# Altium PCB MBOARD.PCBDOC
Units mil, origin at the board's own origin, x right, y up, seen from the top; angles counter-clockwise.
Board outline 6265 x 3760 mil, 2 copper layers (Top Layer, Bottom Layer); 45 components, 37 nets, 161 pads, 107 vias.
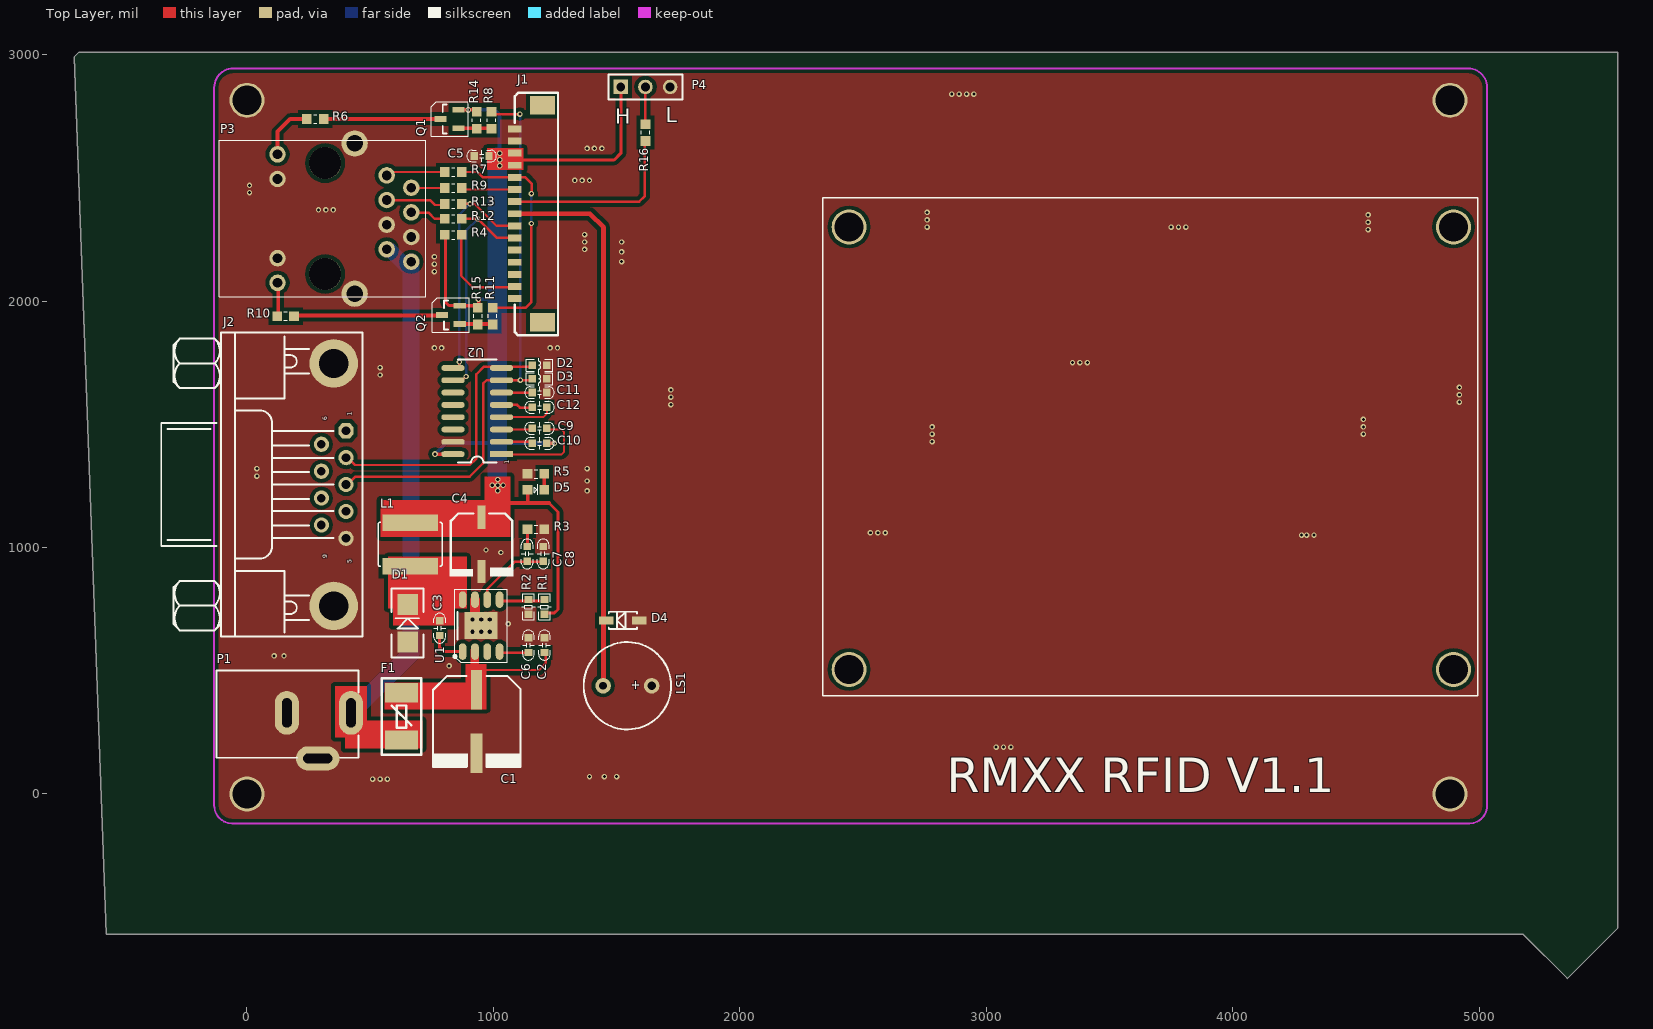
[diagram p0: Top Layer view]
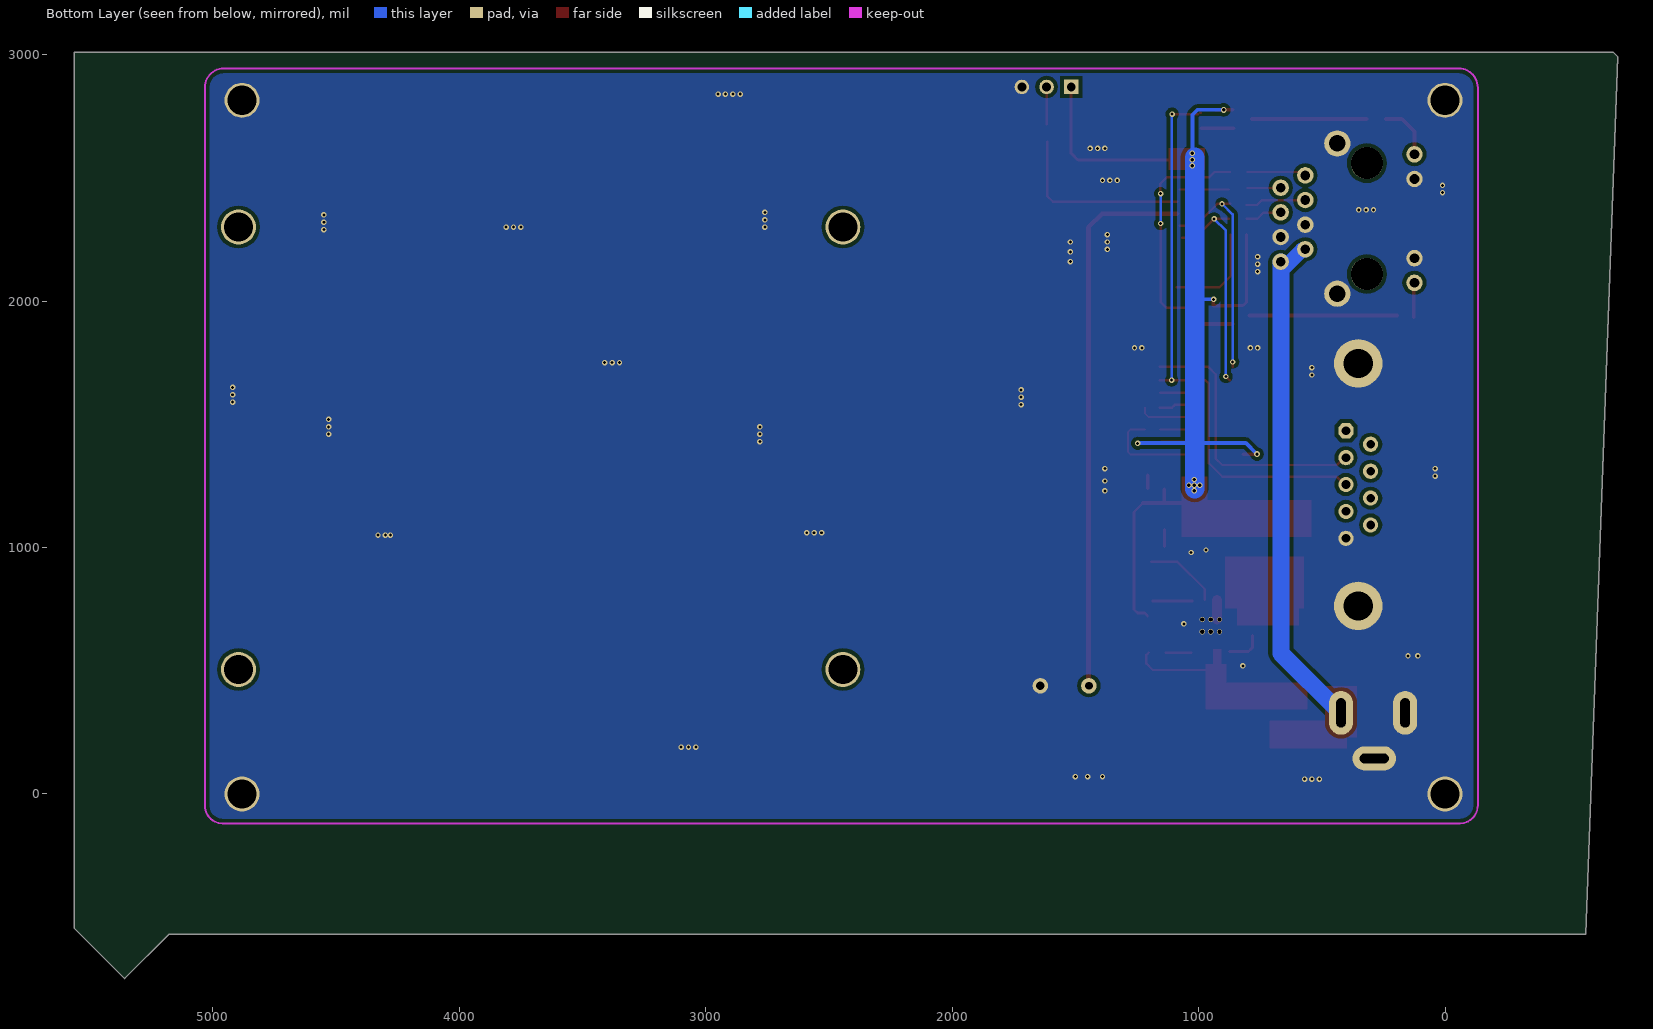
[diagram p1: Bottom Layer view, seen from below]

## Layer stack, top to bottom
Top Layer: signal copper 1.4
Dielectric: core 12.6, FR-4, Dk 4.8
Bottom Layer: signal copper 1.4

## Board outline
-701.7,2990.57 -681.7,3010.57 5563.3,3010.57 5563.3,-544.43 5358.3,-749.43 5178.3,-569.43 -571.7,-569.43

## Design rules (kind name [scope] priority, off if disabled: settings)
Clearance [All] p1 off: gap=15
ComponentClearance [All] p1 off: gap=10 collisioncheckmode=3 verticalgap=10
HoleSize [All] p1: absolutevalues=TRUE maxlimit=300 minlimit=0 maxpercent=80.000 minpercent=20.000
PlaneConnect [All] p1: planeconnectstyle=Relief reliefexpansion=20 reliefentries=4 reliefconductorwidth=14 reliefairgap=10
PolygonConnect [All] p1: connectstyle=Direct reliefconductorwidth=15 reliefentries=4 polygonreliefangle="90 Angle"
RoutingVias [All] p1: holewidth=15 width=25 viastyle="Through Hole" minholewidth=8 minwidth=15 maxholewidth=200 maxwidth=300
SolderMaskExpansion [All] p1: expansion=4
TestPointUsage [All] p1: valid=0 allowmultiple=FALSE
Testpoint [(IsPad And (OnTopLayer Or OnBottomLayer))] p1: side=3 testpointundercomponent=TRUE minsize=40 maxsize=100 preferedsize=60 minholesize=0 maxholesize=40 preferedholesize=32 testpointgrid=1 style=297 order=0-112345678
Width [All] p1: maxlimit=100 minlimit=8 preferedwidth=10 minimp=50.000000 maximp=50.000000 favimp=50.000000
16 further rules are at their usual default settings.

## Components (designator, comment, footprint, x,y, rotation, side; value= is the part's Value field where it differs from the comment)
C1 "Cap Pol1" C8x10-SMD 932,294 r270 top
C2 "Cap" 0603C 1207,604 r180 top
C3 "Cap" 0603C 782.08,673.06 r0 top
C4 "Cap Pol1" C6.3x5.4-SMD 952.08,1013.06 r270 top
C5 "Cap" 0603C 952,2589 r270 top
C6 "Cap" 0603C 1142,604 r180 top
C7 "Cap" 0603C 1137,974 r0 top
C8 "Cap" 0603C 1202,974 r0 top
C9 "0.1uF" 0603C 1187,1484 r270 top
C10 "0.1uF" 0603C 1187.08,1423.06 r90 top
C11 "0.1uF" 0603C 1187,1629 r90 top
C12 "0.1uF" 0603C 1187,1569 r270 top
D1 "SS54" SMA 652.08,693.06 r90 top
D2 "ESD" 0603L 1187,1739 r270 top
D3 "ESD" 0603L 1187,1684 r270 top
D4 "1N4007W" SOD-123 1592,704 r270 top
D5 "LED" 0603-LED 1172,1234 r0 top
F1 "Fuse Thermal" 1812F 627,219 r90 top
J1 "Interface" 1.25-15P 1087,2699 r270 top
J2 "DB9" DB-9/M 402,1474 r0 top
L1 "Inductor" L-6045 662.08,923.06 r90 top
LS1 "Bell" BEEP-9x5.5 1642,439 r180 top
P1 "POW" DC-005 167,329 r0 top
P3 "HR911105A" RJ-45 237,2329 r270 top
P4 "CS" HDR1X3 1517,2869 r0 top
Q1 "SI2305" SOT-23-PMOS 822,2739 r180 top
Q2 "SI2305" SOT-23-PMOS 827,1944 r180 top
R1 "Res Semi" 0603R 1207,759 r0 top
R2 "Res Semi" 0603R 1142,759 r0 top
R3 "Res Semi" 0603 1172,1074 r180 top
R4 "Res Semi" 0603 837,2269 r0 top
R5 "Res1" 0603 1172,1299 r0 top
R6 "Res Semi" 0603 277,2739 r180 top
R7 "Res Semi" 0603 837,2524 r0 top
R8 "Res Semi" 0603 992,2734 r270 top
R9 "Res Semi" 0603 837,2459 r0 top
R10 "Res Semi" 0603 157,1939 r180 top
R11 "Res Semi" 0603 997,1939 r270 top
R12 "Res Semi" 0603 837,2334 r0 top
R13 "Res Semi" 0603 837,2394 r0 top
R14 "Res Semi" 0603 932,2734 r270 top
R15 "Res Semi" 0603 937,1939 r270 top
R16 "Res Semi" 0603 1617,2684 r90 top
U1 "TPS54331" SOP8-POW 950.08,683.06 r90 top
U2 "SP3232EEN" SOIC16-1.27 937.08,1528.06 r180 top

## Footprints (in the part's own frame and the unit in brackets; to place one, negate y for a bottom-side part, rotate by r counter-clockwise, add the part's x,y. Pads: shape width x height; smd on the part's side, far side on the other; paste and mask are expansions set on the pad)
1.25-15P [mm]
  rect 1.9x2.6 smd: 0(-2.45,2.835) 0(19.95,2.835)
  rect 0.7x1.4 smd: 1(17.5,0) 2(16.25,0) 3(15,0) 4(13.75,0) 5(12.5,0) 6(11.25,0) 7(10,0) 8(8.75,0) 9(7.5,0) 10(6.25,0) 11(5,0) 12(3.75,0) 13(2.5,0) 14(1.25,0) 15(0,0)
  silkscreen extent -3.7,0 21.28,4.45
0603 [mm]
  rect 1x1 smd: 1(-0.864,0) 2(0.864,0)
  silkscreen extent -0.18,-0.43 0.18,0.43
0603-LED [mm]
  rect 1x1 smd: 1(-0.864,0) 2(0.864,0)
  silkscreen extent -0.18,-0.51 0.18,0.56
0603C [mil]
  rect 31.5x30 smd: 1(0,30) 2(0,-30)
  silkscreen extent -24,-60 24,60
0603L [mil]
  rect 31.5x30 smd: 1(-0.91,-29.91) 2(-0.91,30.09)
  silkscreen extent -28,-54 27,54
0603R [mil]
  rect 31.5x30 smd: 1(0,30) 2(0,-30)
  silkscreen extent -28,-53 28,53
1812F [mm]
  rect 2x3.4 smd: 1(0,0) 2(4.85,0)
  silkscreen extent -1.5,-2.03 6.35,2.03
BEEP-9x5.5 [mm]
  round 1.6 hole 0.8: 1(5,0)
  round 1.6 hole 0.9: 2(0,0)
  silkscreen extent -2,-4.5 7,4.5
C6.3x5.4-SMD [mm]
  rect 2.4x0.85 smd: 1(-2.794,0) 2(2.794,0)
  silkscreen extent -3.18,-3.3 3.3,3.3, body extent -3.24,-3.18 3.24,3.18, height 3.5
C8x10-SMD [mm]
  rect 4.1x1.148 smd: 1(-3.277,0)
  rect 4.1x1.25 smd: 2(3.277,0)
  silkscreen extent -4.7,-4.5 4.7,4.5, body extent -4.65,-4.25 4.65,4.25, height 10.5
DB-9/M [mil]
  oct 62x62 hole 35: 1(0,0)
  round 62 hole 35: 2(0,-109.17) 3(0,-218.33) 4(0,-327.5) 5(0,-436.67) 6(-100,-55) 7(-100,-164.17) 8(-100,-273.33) 9(-100,-382.5)
  round 196.67 hole 118.33: BO1(-50,-710.83) BO2(-50,273.33)
  silkscreen extent -750,-835 67,398
DC-005 [mm]
  oval 2.5x4.5 hole 1 slot 3 at 90 deg: 1(6.477,0) 2(-0.127,0)
  oval 4.5x2.5 hole 1 slot 3 at 0 deg: 3(3.048,-4.699)
  silkscreen extent -7.37,-4.63 7.23,4.37
HDR1X3 [mm] "Connector; Header; 3 Position"
  rect 1.5x1.5 hole 0.9: 1(0,0)
  round 1.5 hole 0.9: 2(2.54,0) 3(5.08,0)
  silkscreen extent -1.27,-1.27 6.35,1.27
L-6045 [mm]
  rect 1.7x5.7 smd: 1(0,0) 2(4.5,0)
  silkscreen extent 0,-3.3 4.57,3.3
RJ-45 [mm]
  round 1.699 hole 1.001: 1(-4.6,8.38) 2(-3.33,10.92) 3(-2.06,8.38) 4(-0.79,10.92) 5(0.48,8.38) 6(1.75,10.92) 7(3.02,8.38) 8(4.29,10.92) 9(-6.775,-2.87) 10(-4.235,-2.87) 11(3.935,-2.87) 12(6.475,-2.87)
  round 2.7 hole 1.7: 13(-7.895,5.08) 14(7.595,5.08)
  round 3.3 hole 3.3: ""(-5.865,2.03) ""(5.565,2.03)
  silkscreen extent -8.2,-8.89 7.9,12.41
SMA [mm] "Molded Diode, 2-Leads, Body 4.3x2.7mm, IPC Medium Density"
  rect 2.15x2.15 smd: 1(-1.93,0) 2(1.93,0)
  silkscreen extent -3.56,-1.65 3.56,1.65, body extent -2.28,-1.42 2.29,1.42, height 2.95
SOD-123 [mm]
  rect 0.85x1.524 smd: 1(0,0) 2(0,-3.4)
  silkscreen extent -0.9,-3.15 0.9,-0.25
SOIC16-1.27 [mm]
  rect 2.4x0.6 smd: 1(-2.432,3.787)
  oval 2.4x0.6 smd: 2(-2.432,2.517) 3(-2.432,1.247) 4(-2.432,-0.023) 5(-2.432,-1.293) 6(-2.432,-2.563) 7(-2.432,-3.833) 8(-2.432,-5.103) 9(2.568,-5.103) 10(2.568,-3.833) 11(2.568,-2.563) 12(2.568,-1.293) 13(2.568,-0.023) 14(2.568,1.247) 15(2.568,2.517) 16(2.568,3.787)
  silkscreen extent -1.93,-5.96 2.07,4.64
SOP8-POW [mm]
  oval 1.7x0.8 smd: 1(-2.675,1.905) 2(-2.675,0.635) 3(-2.675,-0.635) 4(-2.675,-1.905) 5(2.675,-1.905) 6(2.675,-0.635) 7(2.675,0.635) 8(2.675,1.905)
  rect 2.8x3.4 smd: 9(0,0)
  silkscreen extent -3.78,-2.7 3.77,2.82
SOT-23-PMOS [mm]
  rect 1.25x0.6 smd: 1(-0.925,0.95) 2(-0.925,-0.95) 3(0.925,0)
  silkscreen extent -1.91,-1.78 1.91,1.78, body extent -0.7,-1.5 0.7,1.5, height 1.1

## Part data
C1 C4: "Polarized Capacitor (Radial)"
C2 C3 C5 C6 C7 C8: "Capacitor"
C9 C10 C11 C12: library part 电容, "电容"
D1: library part "D Schottky", "Schottky Diode"
D2 D3: library part 电感
D4: library part "Diode 1N5408", "3 Amp Medium Power Silicon Rectifier Diode"
D5: library part LED1, "Typical RED GaAs LED"
F1: "Thermal Fuse"
J1: library part "Header 12", "Header, 12-Pin"
LS1: "Electrical Bell"
P1: library part "Header 2", "Header, 2-Pin"
P4: library part "Header 3", "Header, 3-Pin"
Q1 Q2: library part IRF9Z14S, "HEXFET P-Channel Power MOSFET"
R1 R2 R3 R4 R6 R7 R8 R9 R10 R11 R12 R13 R14 R15 R16: "Semiconductor Resistor"
R5: "Resistor"
U2: library part MAX232ESE

## Free pads (board coordinates)
  round 141.73 hole 118.11: 8(0,0) 8(0,2814.96) 8(2443.3,505.3) 8(2443.3,2300.57) 8(4881.89,0) 8(4896.06,505.3) 8(4896.06,2300.57)
  round 141.73 hole 118.11 mask+4: 8(4881.89,2814.96)

## Via types
v1: diameter 22, hole 12, Top Layer to Bottom Layer, 91 vias
v2: diameter 22, hole 14, Top Layer to Bottom Layer, 8 vias
v3: diameter 22, hole 18, Top Layer to Bottom Layer, 6 vias
v4: diameter 24, hole 14, Top Layer to Bottom Layer, 2 vias

## Nets (pads, with @x,y where several pads share a name; then routed paths per layer and width w, separated by ;. In a path a pad name is that pad's centre, name@x,y a point inside that pad or via, vN(x,y) a via of type N, cw(c..) or ccw(c..) an arc to the next point about the centre after c; other vN are vias at no path point)
+5V: C4.1 C5.1 C10.2 D5.1 J1.12 J1.13 L1.2 P4.1 Q1.2 Q2.2 R1.2 R4.1 R14.1 R15.1 U2.16 | length 4237.5
  Top Layer w12: R4.1@806,2270 806,1995 819,1982 Q2.2@863,1982 ; v1@937,2007 v1@940,2007 ; 1103,2573 1490,2573 1517,2600 P4.1 ; R1.2@1207,723.06 1217.94,734 1247,734 1262,749 1262,1144 1225.43,1180.57
  Top Layer w15: v4@764,1378.97 U2.16@819,1378.97 ; Q1.2@862,2776.4 R14.1@931.4,2776.4 ; Q2.2@864,1981.4 940,1981.4 v1@940,2007 ; 1033.3,1180.57 1225.43,1180.57 ; 1139,1184 D5.1@1139,1236 ; C10.2 v1(1247.08,1423.06)
  Bottom Layer w15: v4@764,1380 808,1424 1244,1424 v1@1246,1422 ; v4@903,2776 1005,2776 1025,2756 v2@1025,2598 ; v1(939,2007) 996,2007
  Bottom Layer w80: v2@1016,1239 1016,2583
  other v2: 1017,1230 1017,1252 995,1253 1039,1253 1017,1276 1025,2550 1026,2574 1025,2600
  other v4: 763,1379 898,2776
CS: P4.2 R16.2 | length 157
  Top Layer w10: R16.2 P4.2@1617,2875
GND: C1.2 C2.2 C4.2 C5.2 C6.2 C8.1 C11.2 D1.1 D2.2 D3.2 D4.1 J1.14 J1.15 J2.5 J2.BO1 J2.BO2 LS1.2 P1.2 P1.3 P3.5 P3.6 P3.10 P3.11 P3.13 P3.14 P4.3 pad.8@0,0 pad.8@0,2814.96 pad.8@4881.89,0 pad.8@4881.89,2814.96 R2.2 R3.1 R5.1 U1.7 U1.9 U2.15 | length 80.3
  Top Layer w40: U1.9@925.08,708.06 U1.7
  other v1: 510,60 540,60 570,60 1390,70 1450,70 1450,70 1500,70 3040,190 3070,190 3100,190 820,520 110,560 150,560 1060,690 1030,980 970,990 4280,1050 4300,1050 4330,1050 2530,1060 2560,1060 2590,1060 1380,1230 1380,1270 40,1290 40,1320 1380,1320 2780,1430 2780,1460 4530,1460 2780,1490 4530,1490 4530,1520 1720,1580 4920,1590 1720,1610 4920,1620 1720,1640 4920,1650 540,1700 540,1730 3350,1750 3380,1750 3410,1750 760,1810 790,1810 1230,1810 1260,1810 760,2120 760,2150 1520,2160 760,2180 1520,2200 1370,2210 1370,2240 1520,2240 1370,2270 4550,2290 2760,2300 3750,2300 3780,2300 3810,2300 4550,2320 2760,2330 4550,2350 2760,2360 290,2370 320,2370 350,2370 10,2440 10,2470 1330,2490 1360,2490 1390,2490 1380,2620 1410,2620 1440,2620 2860,2840 2890,2840 2920,2840 2950,2840
  other v3: 915.08,658.06 950.08,658.06 985.08,658.06 915.08,708.06 950.08,708.06 985.08,708.06
NetC1_1: C1.1 C2.1 F1.2 U1.2 | length 314.8
  Top Layer w10: 957.08,503.06 1186.06,503.06 1212,529 1212,564 C2.1@1202,574
NetC3_1: C3.1 D1.2 L1.1 U1.8
NetC3_2: C3.2 U1.1 | length 149.3
  Top Layer w12: C3.2 782.08,593.06 797.39,577.74 U1.1
NetC6_1: C6.1 U1.4 | length 102.3
  Top Layer w12: U1.4@1029.76,573.06 C6.1@1132.08,573.06
NetC7_1: C7.1 R3.2 | length 70
  Top Layer w12: C7.1@1138,1004 R3.2
NetC7_2: C7.2 C8.2 U1.6 | length 306.1
  Top Layer w10: U1.6 975.08,831.06 1087.08,943.06 1132.08,943.06 C8.2@1192.08,943.06
NetC9_1: C9.1 U2.1 | length 400.4
  Top Layer w8: U2.1@1047.08,1373.06 1052.08,1378.06 1277.08,1378.06 1287.08,1388.06 1287.08,1468.06 1277.08,1478.06 C9.1@1217.08,1478.06
NetC9_2: C9.2 U2.3 | length 123.3
  Top Layer w10: U2.3 C9.2@1156.16,1478.97
NetC10_1: C10.1 U2.2 | length 118.3
  Top Layer w10: U2.2 C10.1@1151.16,1428.97
NetC11_1: C11.1 U2.6 | length 123.3
  Top Layer w10: U2.6 C11.1@1156.16,1628.97
NetC12_1: C12.1 U2.4 | length 215.1
  Top Layer w8: U2.4 1202.99,1528.97 1217.08,1543.06 C12.1@1217.08,1568.06
NetC12_2: C12.2 U2.5 | length 128.8
  Top Layer w10: U2.5 1096.16,1578.97 1107.08,1568.06 C12.2@1157.08,1568.06
NetD4_2: D4.2 J1.8 LS1.1 | length 2242
  Top Layer w20: J1.8 1391.49,2354.51 1447,2299 LS1.1@1447,440
NetD5_2: D5.2 R5.2 | length 51
  Top Layer w15: D5.2@1206,1241 R5.2@1206,1292
NetJ1_2: J1.2 R4.2 | length 406.5
  Top Layer w10: R4.2@869,2270 869,2103 916,2056 J1.2@1089,2056
NetJ1_9: J1.9 R16.1 | length 757.6
  Top Layer w10: J1.9 1591.72,2403.72 1615,2427 R16.1@1615,2647
NetP3_1: P3.1 R7.1 | length 233
  Top Layer w10: P3.1@576,2517 576,2524 R7.1@802,2524
NetP3_2: P3.2 R9.1 | length 136
  Top Layer w10: P3.2@667,2459 R9.1
NetP3_3: P3.3 R13.1 | length 250.1
  Top Layer w10: P3.3@566,2412 568,2410 743,2410 763,2390 R13.1@807,2390
NetP3_4: P3.4 R12.1 | length 145.4
  Top Layer w10: P3.4@669,2359 737,2359 762,2334 R12.1@804,2334
NetP3_9: P3.9 R6.2 | length 233.1
  Top Layer w15: P3.9@124,2593 124,2688 175,2739 R6.2@241,2739
NetP3_12: P3.12 R10.2 | length 140
  Top Layer w15: R10.2@127,1934 P3.12@127,2074
NetQ1_1: Q1.1 R8.2 R14.2 | length 131
  Top Layer w15: Q1.1@857,2702 R8.2@988,2702
NetQ1_3: Q1.3 R6.1 | length 467
  Top Layer w15: R6.1@317,2739 Q1.3@784,2739
NetQ2_1: Q2.1 R11.2 R15.2 | length 137
  Top Layer w15: Q2.1@862,1907 R11.2@999,1907
NetQ2_3: Q2.3 R10.1 | length 599
  Top Layer w15: R10.1@194,1942 Q2.3@793,1942
NetR1_1: R1.1 R2.1 U1.5 | length 161.7
  Top Layer w12: U1.5@1025.08,783.37 1186.76,783.37
RX: J1.7 R13.2 U2.9 | length 921
  Top Layer w10: U2.9@862,1733 v1@862,1752 ; R13.2@872,2395 924,2395 1013.7,2305.3 J1.7@1077,2305.3
  Bottom Layer w10: v1(862,1753) 862,2352 v1(905,2395)
RXD: D2.1 J2.2 U2.8 | length 1126.5
  Top Layer w10: J2.2@408,1365 438,1335 904,1335 931,1362 931,1703 961.97,1733.97 D2.1@1157.08,1733.97
TX: J1.6 R12.2 U2.10 | length 900.6
  Top Layer w10: U2.10@874,1679 v1(889,1694) ; R12.2@878,2334 v1(937,2334) 1013.08,2257.92 J1.6@1066,2257.92
  Bottom Layer w10: v1(889,1694) 889,2286 v1(937,2334)
TXD: D3.1 J2.3 R8.1 U2.7 | length 2298.3
  Top Layer w10: J2.3@408,1255 441,1288 904,1288 958,1342 958,1665 971.97,1678.97 D3.1@1157.16,1678.97 ; R8.1@992,2765 R8.1@992.35,2765.04 ; R8.1@1003,2759 v1(1107,2759)
  Bottom Layer w10: v1(1109,1679) v1@1109,2759
VIN: F1.1 P1.1 P3.7 P3.8 | length 2059.4
  Bottom Layer w60: P3.7 566.92,2207.08 580.9,2207.08 666.92,2121.06
  Bottom Layer w70: P1.1@430,335 666,571 P3.8@666,2158
WG_A: J1.11 R7.2 R11.1 | length 942.2
  Top Layer w10: R7.2@872,2524 935,2524 957,2502 1130,2502 1155,2477 v1@1155,2435 ; R11.1@1004,1974 1132,1974 1153,1995 v1@1153,2314
  Bottom Layer w10: v1@1153,2314 v1@1153,2435
  other v1: 1154,2315 1154,2436
WG_B: J1.10 R9.2 | length 198.9
  Top Layer w10: R9.2@877.06,2452.94 1044.08,2452.94 J1.10@1076,2453
pads on no net: J1.0 J1.1 J1.3 J1.4 J1.5 J2.1 J2.4 J2.6 J2.7 J2.8 J2.9 P3. U1.3 U2.11 U2.12 U2.13 U2.14

## Polygon pours and split planes (outlines as drawn)
GND on Top Layer "Top Layer-No Net 1" (solid, remove dead copper, pour order 1000): -445,3100 5215,3100 5255,3140 5195,3080 5195,-260 -325,-260 -485,-420
GND on Bottom Layer "Top Layer-No Net 1" (solid, remove dead copper, pour order 1001): -480,3180 -440,3140 5300,3140 5300,-60 5100,-260 5020,-340 -160,-340

## Keep-outs
Keep-Out Layer:
  lines w8: -133,-47 ccw(c-60.57,-47) -60.57,-119.43 4960.57,-119.43 ccw(c4960.57,-48) 5032,-48 5032,2868 ccw(c4956,2868) 4956,2944 -56,2944 ccw(c-56,2867) -133,2867 -133,-47

## Other copper
Top Layer:
  rectangle net NetC1_1: 885.72,433.06 972.08,528.06
  rectangle net NetC1_1: 907.08,523.06 942.08,588.06
  rectangle net +5V: 542.08,1043.06 1052.08,1193.06
  rectangle net NetC3_1: 572.08,753.06 892.08,963.06
  rectangle net NetC3_1: 822.08,753.06 892.08,833.06
  rectangle net NetC3_1: 592.08,683.06 843.78,833.06
  rectangle net NetC1_1: 557,343.06 972,453.06
  rectangle net VIN: 397,184 712,299
  rectangle net VIN: 357,229 487,439
  rectangle net +5V: 963,1042 1069,1289
  rectangle net +5V: 974,2533 1122,2621

## Silkscreen, mask and mechanical layers (free items; w line width, h text height)
Top Overlay:
  lines w6: 2337,399 2337,2418.68 4994.48,2418.68 4994.48,399 2337,399
  text "L" at 1700,2725 h60
  text "H" at 1495,2720 h60
  text "RMXX RFID V1.1" at 2840,-40 h240
Top Solder:
  rectangle: 2690,1390 4635,2410

## Text inside footprints (layer, text, board x,y; h text height)
J2: Top Overlay "9" at 332,955.67 h30 r90; Top Overlay "5" at 432,935.67 h30 r90; Top Overlay "1" at 432,1535.67 h30 r90; Top Overlay "6" at 332,1515.67 h30 r90
LS1: Top Overlay "+" at 1597,469 h60 r180
U2: Top Overlay "1" at 1069.83,1339.97 h30 r90